# EAGLE board pe project (EAGLE 9.6.2)
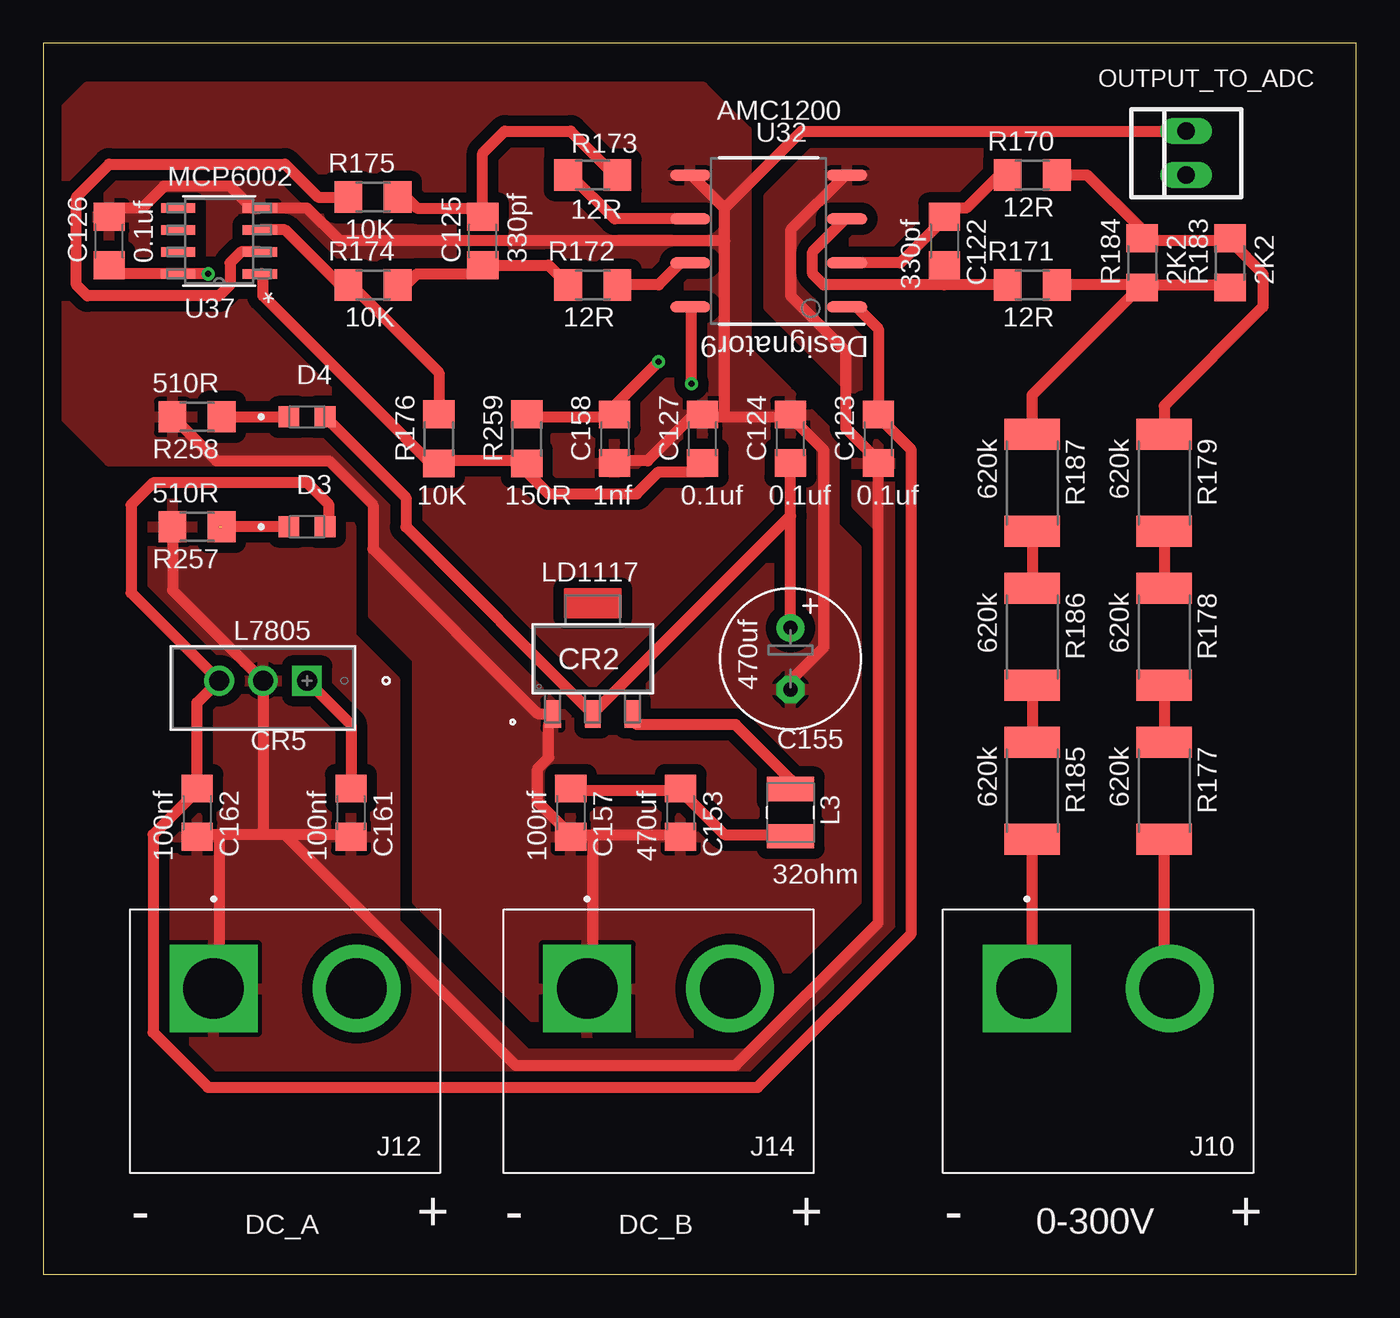
[diagram p0: board, top side]
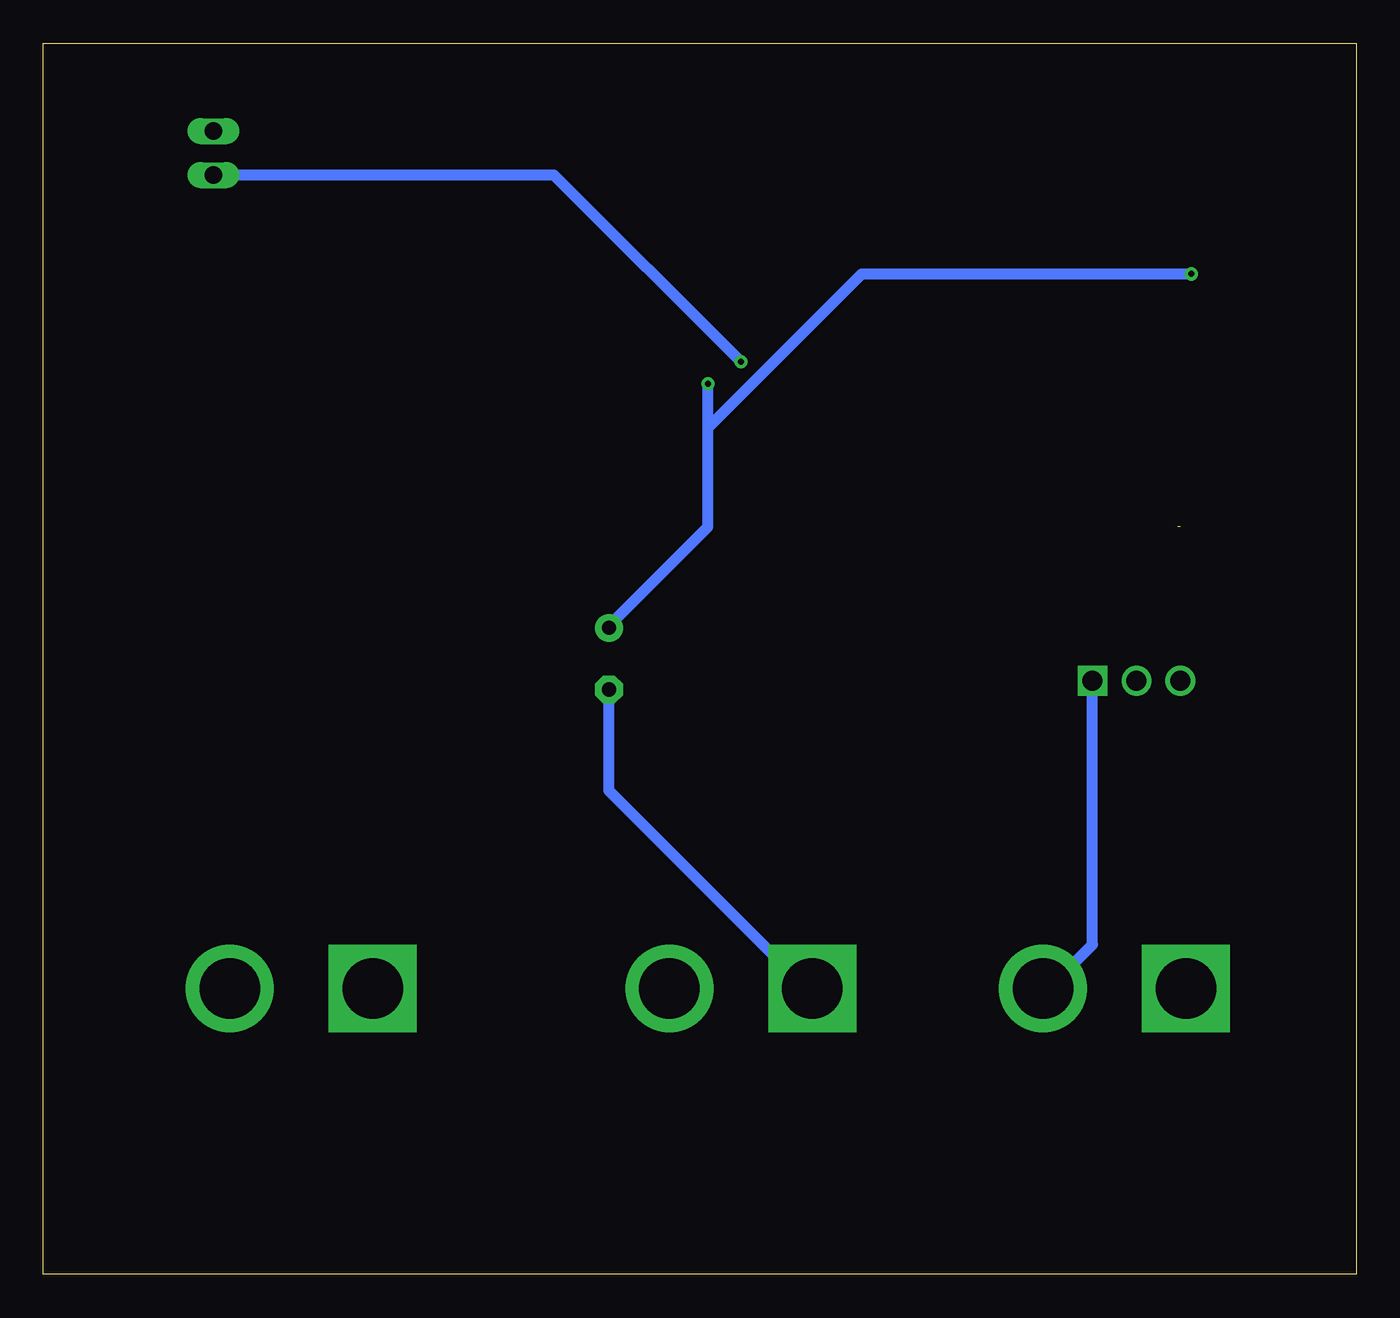
[diagram p1: board, bottom side, seen from below]

Size 75.87 x 71.11 mm. Coordinates in mm from the lower left corner, seen from the top.
Outline: 0,0 75.87,0 75.87,71.11 0,71.11 0,0
Copper layers (1*16): Top 0.035mm / dielectric 1.5mm / Bottom 0.035mm
Design rules "default *": minimum track width 25mil, minimum drill 0.35mm, track to track 10mil, track to pad 10mil, pad to pad 10mil, via to via 10mil, smd to smd 6mil, copper to edge 40mil, drill to drill 10mil, minimum pad ring 10mil, minimum via ring 8mil, stop-mask expansion 4mil, vias tented up to drill 0mil, thermal gap 10mil

## Footprints (pad centres in the part's own frame; a part is rotated, then mirrored left to right if it is on the bottom)
C1206 = smd 1.6 x 1.8: 1 -1.4,0; 2 1.4,0
E3,5-8 = drill 0.813 pad 1.6: + -1.778,0 | drill 0.813 pad 1.6 octagon: - 1.778,0
SOT-223_STM = smd 0.914 x 1.6: 1 -2.3,-3.2; 2 0,-3.2; 3 2.3,-3.2
TO-220_STM = drill 1.143 pad 1.651 square: 1 0,0 | drill 1.143 pad 1.651: 2 2.54,0; 3 5.08,0
LED_HSMS-C170 = smd 1.2 x 1.2: A 1.05,0; C -1.05,0
TE_5-1437648-7 = drill 3.5 pad 5.08 square: 1 -4.13,0 | drill 3.5 pad 5.08: 2 4.13,0
BEADC3225X220N = smd 1.4 x 2.72: 1 -1.36,0; 2 1.36,0
R1206 = smd 1.6 x 1.803: 1 -1.422,0; 2 1.422,0
R2512 = smd 1.8 x 3.2: 1 -2.8,0; 2 2.8,0
DUB0008A_N = smd 2.35 x 0.65: 1 -4.525,3.81; 2 -4.525,1.27; 3 -4.525,-1.27; 4 -4.525,-3.81; 5 4.525,-3.81; 6 4.525,-1.27; 7 4.525,1.27; 8 4.525,3.81
SOIC8-N_MC_MCH = smd 1.981 x 0.559: 1 -2.362,1.905; 2 -2.362,0.635; 3 -2.362,-0.635; 4 -2.362,-1.905; 5 2.362,-1.905; 6 2.362,-0.635; 7 2.362,0.635; 8 2.362,1.905
22-23-2021 = drill 1 long: 1 -1.27,0; 2 1.27,0

## Placement (x,y rotation side)
C122  330pf  [C1206]  52.07,59.69 270 top
C123  0.1uf  [C1206]  48.26,48.26 90 top
C124  0.1uf  [C1206]  43.18,48.26 90 top
C125  330pf  [C1206]  25.4,59.69 90 top
C126  0.1uf  [C1206]  3.81,59.69 90 top
C127  0.1uf  [C1206]  38.1,48.26 90 top
C153  470uf  [C1206]  36.83,26.67 270 top
C155  470uf  [E3,5-8]  43.18,35.56 270 top
C157  100nf  [C1206]  30.48,26.67 270 top
C158  1nf  [C1206]  33.02,48.26 270 top
C161  100nf  [C1206]  17.78,26.67 270 top
C162  100nf  [C1206]  8.89,26.67 270 top
CR2  LD1117  [SOT-223_STM]  31.75,35.56 0 top
CR5  L7805  [TO-220_STM]  15.24,34.29 180 top
D3  HSMG-C170  [LED_HSMS-C170]  15.24,43.18 0 top
D4  HSMG-C170  [LED_HSMS-C170]  15.24,49.53 0 top
J10  0-300V  [TE_5-1437648-7]  60.96,16.51 0 top
J12  DC_A  [TE_5-1437648-7]  13.97,16.51 0 top
J14  DC_B  [TE_5-1437648-7]  35.56,16.51 0 top
L3  32ohm  [BEADC3225X220N]  43.18,26.67 90 top
R170  12R  [R1206]  57.15,63.5 180 top
R171  12R  [R1206]  57.15,57.15 180 top
R172  12R  [R1206]  31.75,57.15 180 top
R173  12R  [R1206]  31.75,63.5 0 top
R174  10K  [R1206]  19.05,57.15 180 top
R175  10K  [R1206]  19.05,62.23 180 top
R176  10K  [R1206]  22.86,48.26 270 top
R177  620k  [R2512]  64.77,27.94 270 top
R178  620k  [R2512]  64.77,36.83 270 top
R179  620k  [R2512]  64.77,45.72 270 top
R183  2K2  [R1206]  68.58,58.42 90 top
R184  2K2  [R1206]  63.5,58.42 90 top
R185  620k  [R2512]  57.15,27.94 270 top
R186  620k  [R2512]  57.15,36.83 270 top
R187  620k  [R2512]  57.15,45.72 270 top
R257  510R  [R1206]  8.89,43.18 180 top
R258  510R  [R1206]  8.89,49.53 180 top
R259  150R  [R1206]  27.94,48.26 90 top
U32  AMC1200  [DUB0008A_N]  41.91,59.69 180 top
U37  MCP6002  [SOIC8-N_MC_MCH]  10.16,59.69 180 top
X1  OUTPUT_TO_ADC  [22-23-2021]  66.04,64.77 90 top

## Library data of the parts
C122-C127 C153 C155 C157 C158 C161 C162 = rcl; SPICEPREFIX: C
CR2 = LD1117as; COPYRIGHT: Copyright (C) 2026 Ultra Librarian. All rights reserved.; DATASHEET: https://www.st.com/resource/en/datasheet/ld1117a.pdf; DESCRIPTION: Low drop fixed and adjustable positive voltage regulators; MANUFACTURER_NAME: STMicroelectronics; MANUFACTURER_PART_NUMBER: LD1117AS33TR
CR5 = 7805; COPYRIGHT: Copyright (C) 2026 Ultra Librarian. All rights reserved.; DATASHEET: https://www.st.com/resource/en/datasheet/l78.pdf; DESCRIPTION: Positive voltage regulator ICs; MANUFACTURER_NAME: STMicroelectronics; MANUFACTURER_PART_NUMBER: L7805ACV
D3 D4 = HSMG-C170; MANUFACTURER: Broadcom; MAXIMUM_PACKAGE_HEIGHT: 0.8mm; PARTREV: March 25, 2022; SNAPEDA_PN: HSMG-C170; STANDARD: Manufacturer Recommendations
J10 J12 J14 = 4PCV-02-006; MANUFACTURER: TE; PARTREV: R; STANDARD: Manufacturer Recommendations
L3 = BLE32PN300SZ1L; AVAILABILITY: In Stock; CHECK_PRICES: https://www.snapeda.com/parts/BLE32PN300SZ1L/Murata/view-part/?ref=eda; DESCRIPTION: 30 Ohms @ 100 MHz 1 Power Line Ferrite Bead 1210 (3225 Metric) 10A 1.6mOhm; MF: Murata Electronics; MP: BLE32PN300SZ1L; PACKAGE: 3225 Murata; PRICE: None; SNAPEDA_LINK: https://www.snapeda.com/parts/BLE32PN300SZ1L/Murata/view-part/?ref=snap
R170-R179 R183-R187 R257-R259 = rcl; SPICEPREFIX: R
U32 = amc1200; COPYRIGHT: Copyright (C) 2026 Ultra Librarian. All rights reserved.; DATASHEET: https://www.ti.com/lit/gpn/amc1200-q1; DESCRIPTION: Automotive, &plusmn;250-mV input, precision current sensing basic isolated amplifier 8-SOP -40 to 105; MANUFACTURER_NAME: Texas Instruments; MANUFACTURER_PART_NUMBER: AMC1200STDUBRQ1; REFDES: RefDes; TYPE: TYPE
U37 = mcp6002; COPYRIGHT: Copyright (C) 2026 Ultra Librarian. All rights reserved.; MANUFACTURER_NAME: Microchip; MANUFACTURER_PART_NUMBER: MCP6002T-I/SN
X1 = con-molex; MF: MOLEX; MPN: 22-23-2021; OC_FARNELL: 1462926; OC_NEWARK: 25C3832

## Nets
AC_V_B_OUT: C127.1 R176.2 R259.1 U37.1
GND_A: C123.1 C161.2 C162.2 CR5.2 J12.1 R257.2 U32.4
GND_B: C124.2 C126.2 C127.2 C153.2 C155.- C157.2 C158.2 CR2.1 J14.1 R258.2 U32.5 U37.4 X1.2
N$1: R170.1 R179.1 R183.2 R184.2
N$2: R171.1 R183.1 R184.1 R187.1
N$43: C122.1 R170.2 U32.2
N$46: R172.1 U32.7
N$47: R173.1 U32.6
N$48: C125.2 R173.2 R175.1
N$49: C125.1 R172.2 R174.1
N$50: R174.2 R176.1 U37.3
N$62: R177.1 R178.2
N$69: R178.1 R179.2
N$76: R175.2 U37.2
N$79: R185.1 R186.2
N$80: R186.1 R187.2
N$85: J10.2 R177.2
N$87: J10.1 R185.2
N$88: C122.2 R171.2 U32.3
N$171: CR2.3 L3.2
N$176: D3.C R257.1
N$177: D4.C R258.1
OUTPUT_TO_ADC: C158.1 R259.2 X1.1
VCC_12V_A+: C161.1 CR5.1 J12.2
VCC_12V_B: C153.1 C157.1 L3.1
VCC_12V_B+: J14.2
VCC_A: C123.2 C162.1 CR5.3 D3.A U32.1
VCC_B: C124.1 C126.1 C155.+ CR2.2 D4.A U32.8 U37.8

## Tracks (layer width: path | path; a pad name or v marks a point on that pad's centre or on a via)
AC_V_B_OUT
  Top 0.635: C127.1 38.1,46.35 35.56,46.35 34.29,45.09 29.21,45.09 27.94,46.35 R259.1 27.94,46.99 22.86,46.99 R176.2 22.86,46.35 12.7,56.52 12.7,57.78 U37.1
GND_A
  Top 0.635: U32.4 46.35,63.5 43.18,60.33 43.18,56.52 46.35,53.34 46.35,48.9 48.26,46.99 C123.1 48.26,20.32 40.01,12.06 27.3,12.06 13.97,25.4 | 13.97,25.4 17.78,25.4 C161.2 | 13.97,25.4 12.7,25.4 | 12.7,25.4 10.16,25.4 | 10.16,25.4 8.89,25.4 C162.2 | 12.7,25.4 CR5.2 7.47,39.52 R257.2 | 10.16,25.4 10.16,16.51 J12.1
  pour Top (isolate 0.61): 41.91,62.23 41.91,55.88 45.72,52.07 46.99,50.8 46.99,44.45 48.26,43.18 48.26,20.32 40.64,12.7 27.94,12.7 20.32,20.32 20.32,34.29 17.78,36.83 17.78,41.91 17.78,43.18 15.24,45.72 5.08,45.72 1.27,41.91 1.27,13.97 7.62,7.62 68.58,7.62 69.85,8.89 72.39,11.43 72.39,58.42 69.85,60.96 68.58,60.96 63.5,60.96 59.69,64.77 44.45,64.77
GND_B
  Top 0.635: 30.48,25.4 28.57,27.3 28.57,29.21 29.21,29.84 29.21,31.75 CR2.1 29.21,32.38 28.57,32.38 19.05,41.91 19.05,44.45 16.51,46.99 10.01,46.99 R258.2 7.62,49.53 | 30.48,25.4 31.75,25.4 | 31.75,25.4 36.83,25.4 C153.2 | 30.48,25.4 C157.2 | 31.75,25.4 31.75,16.51 J14.1 | C126.2 3.81,61.59 5.71,61.59 6.99,62.87 10.79,62.87 12.06,61.59 U37.4 15.24,61.59 17.14,59.69 39.37,59.69 | C158.2 33.02,46.99 34.92,46.99 38.1,50.16 C127.2 38.1,49.53 39.37,49.53 | 39.37,49.53 43.18,49.53 | 39.37,61.59 37.47,63.5 U32.5 | 39.37,49.53 39.37,59.69 | 39.37,59.69 39.37,61.59 | X1.2 43.81,66.04 39.37,61.59 | 43.18,49.53 45.09,47.62 45.09,36.2 43.18,34.29 C155.- | 43.18,49.53 C124.2
  Bottom 0.635: C155.- 43.18,27.94 31.75,16.51 J14.1
  pour Top (isolate 0.61): 1.27,67.31 1.27,49.53 3.81,46.99 16.51,46.99 19.05,44.45 19.05,38.1 21.59,35.56 21.59,21.59 29.21,13.97 39.37,13.97 46.99,21.59 46.99,41.91 45.72,43.18 45.72,48.26 40.64,53.34 40.64,66.04 38.1,68.58 2.54,68.58
N$1
  Top 0.635: 68.58,59.69 63.5,59.69 R184.2 63.5,60.33 60.33,63.5 R170.1 | R179.1 64.77,50.16 70.48,55.88 70.48,57.78 68.58,59.69 | 68.58,59.69 R183.2
N$2
  Top 0.635: 63.5,57.15 R171.1 | 63.5,57.15 68.58,57.15 R183.1 | 63.5,57.15 R184.1 | 57.15,48.9 R187.1 57.15,50.8 63.5,57.15
N$43
  Top 0.635: R170.2 55.24,63.5 53.34,61.59 52.07,61.59 C122.1 52.07,60.96 49.53,58.42 U32.2
N$46
  Top 0.635: R172.1 35.56,57.15 36.83,58.42 U32.7
N$47
  Top 0.635: U32.6 33.02,60.96 30.48,63.5 R173.1
N$48
  Top 0.635: R175.1 20.95,62.23 21.59,61.59 25.4,61.59 C125.2 25.4,64.77 26.67,66.04 30.48,66.04 33.02,63.5 R173.2
N$49
  Top 0.635: R174.1 20.95,57.15 21.59,57.78 25.4,57.78 C125.1 29.19,58.29 R172.2
N$50
  Top 0.635: R176.1 22.86,52.07 17.78,57.15 R174.2 17.14,57.15 13.97,60.33 U37.3
N$62
  Top 0.635: R178.2 R177.1
N$69
  Top 0.635: R179.2 R178.1
N$76
  Top 0.635: R175.2 15.88,62.23 13.97,64.14 3.81,64.14 1.91,62.23 1.91,57.15 2.54,56.52 10.16,56.52 10.79,57.15 10.79,58.42 11.43,59.05 U37.2
N$79
  Top 0.635: R186.2 R185.1
N$80
  Top 0.635: R187.2 R186.1
N$85
  Top 0.635: R177.2 64.77,16.51 J10.2
N$87
  Top 0.635: R185.2 57.15,16.51 J10.1
N$88
  Top 0.635: 52.07,57.78 C122.2 52.07,57.15 | R171.2 52.07,57.15 | 52.07,57.15 45.09,57.15 44.45,57.78 44.45,59.05 46.35,60.96 U32.3
N$171
  Top 0.635: CR2.3 34.29,31.75 40.01,31.75 43.18,28.57 L3.2
N$176  (1 unrouted)
  Top 0.635: D3.C 10.16,43.18
N$177
  Top 0.635: R258.1 D4.C
OUTPUT_TO_ADC  (via drill 0.35)
  Top 0.635: R259.2 27.94,49.53 33.02,49.53 C158.1 33.02,50.16 v35.56,52.7
  Bottom 0.635: X1.1 46.35,63.5 v35.56,52.7
VCC_12V_A+
  Top 0.635: C161.1 17.78,31.75 CR5.1
  Bottom 0.635: CR5.1 15.24,19.05 17.78,16.51 J12.2
VCC_12V_B
  Top 0.635: 36.83,27.94 30.48,27.94 C157.1 | 36.83,27.94 39.37,25.4 43.18,25.4 L3.1 | 36.83,27.94 C153.1
VCC_A
  Top 0.635: U32.1 46.99,55.88 48.26,54.61 C123.2 48.26,49.53 50.16,47.62 50.16,19.68 41.27,10.79 9.53,10.79 6.35,13.97 6.35,25.4 8.89,27.94 C162.1 8.89,33.02 CR5.3 5.08,39.37 5.08,44.45 6.35,45.72 15.24,45.72 16.51,44.45 16.51,43.4 D3.A
VCC_B  (via drill 0.35)
  Top 0.635: 31.75,32.38 20.95,43.18 20.95,44.87 D4.A | C126.1 3.81,57.78 U37.8 v9.53,57.78 | C155.+ 43.18,43.81 | 43.18,43.81 C124.1 | v37.47,51.44 37.47,55.88 U32.8 | 43.18,43.81 31.75,32.38 | 31.75,32.38 CR2.2
  Bottom 0.635: 37.47,48.9 37.47,43.18 43.18,37.47 C155.+ | 37.47,48.9 v37.47,51.44 | v9.53,57.78 28.57,57.78 37.47,48.9

## Text on the board
tNames: - | + | - | + | - | +